# Altium PCB PlacaE3.PcbDoc
Units mm, origin at the board's own origin, x right, y up, seen from the top; angles counter-clockwise.
Board outline 100 x 50 mm, 2 copper layers (Top Layer, Bottom Layer); 27 components, 39 nets, 90 pads, 12 vias.
Unrouted connection lines stored in the file: 16.
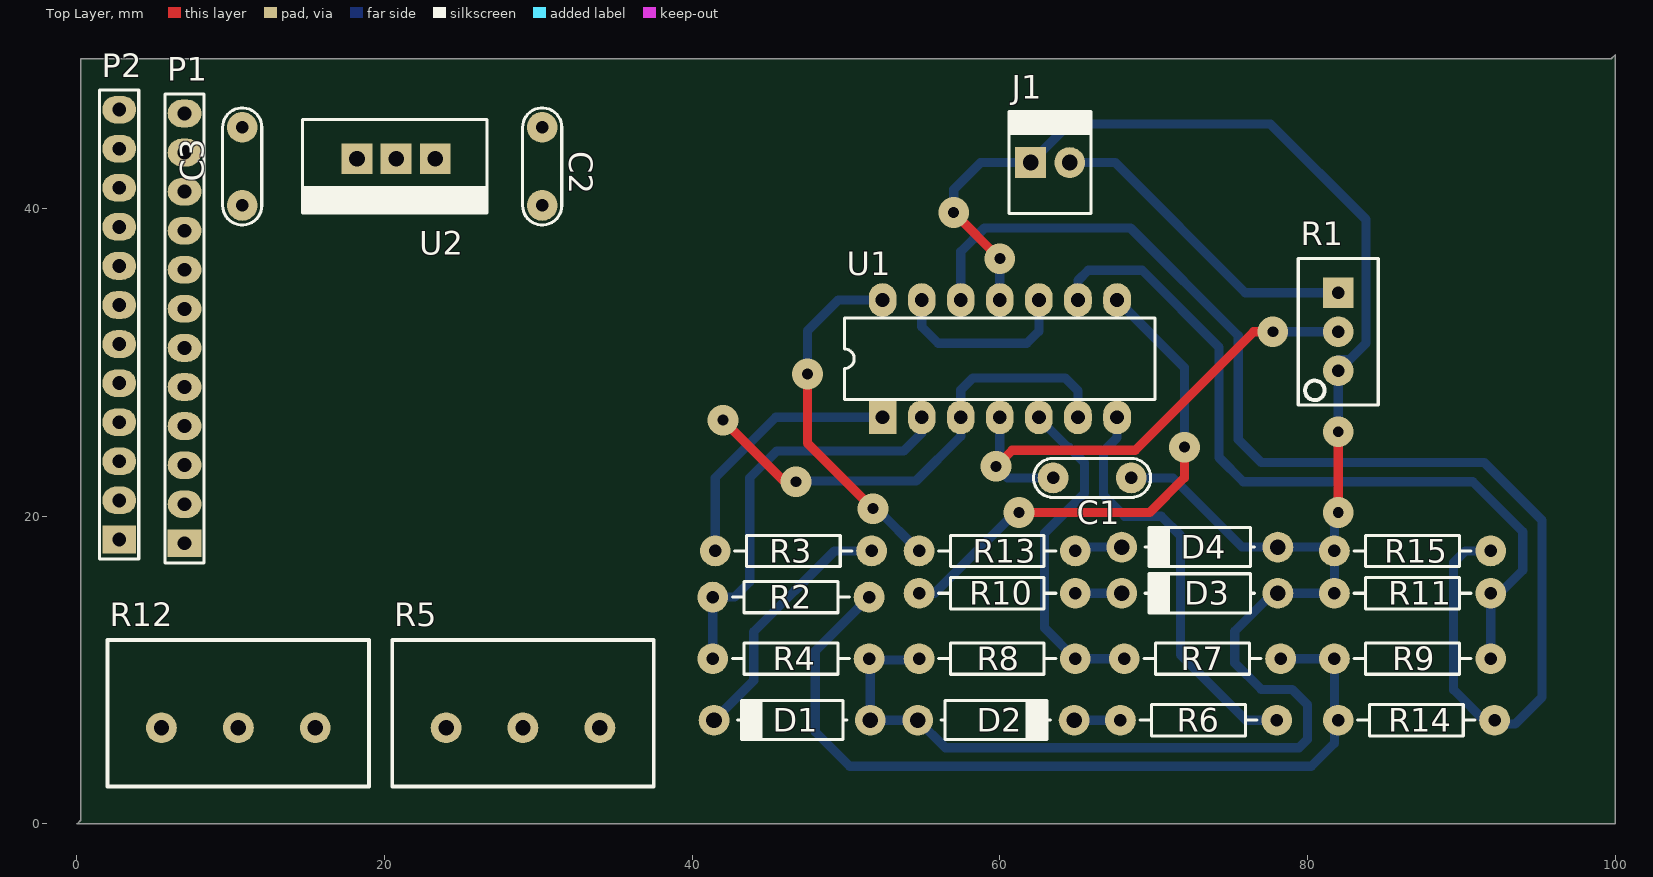
[diagram p0: Top Layer view]
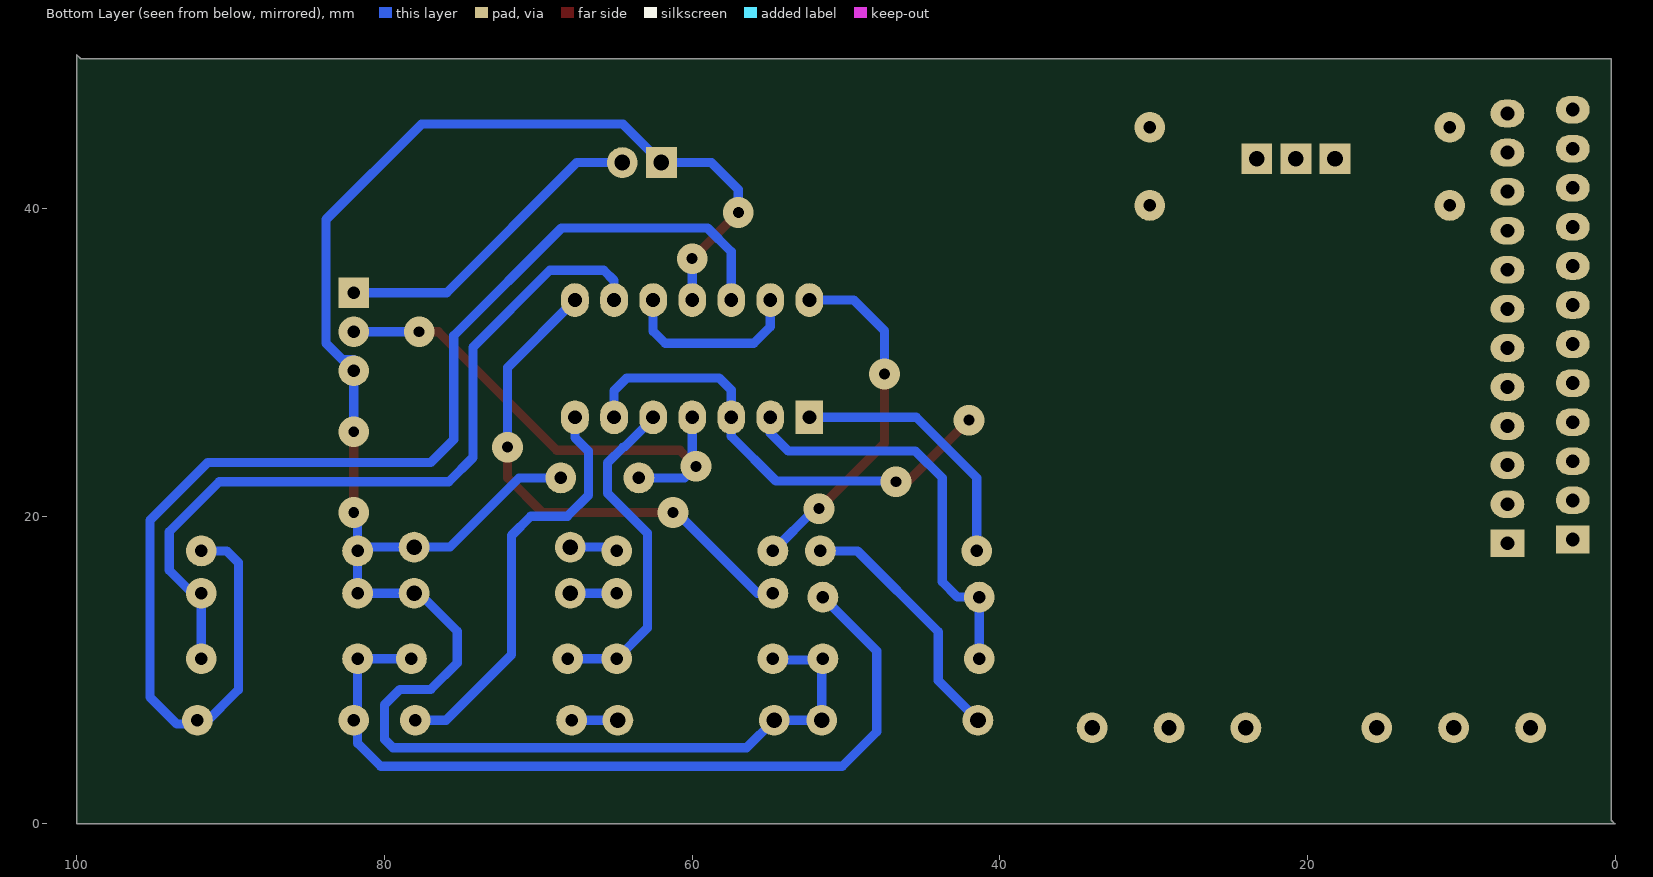
[diagram p1: Bottom Layer view, seen from below]
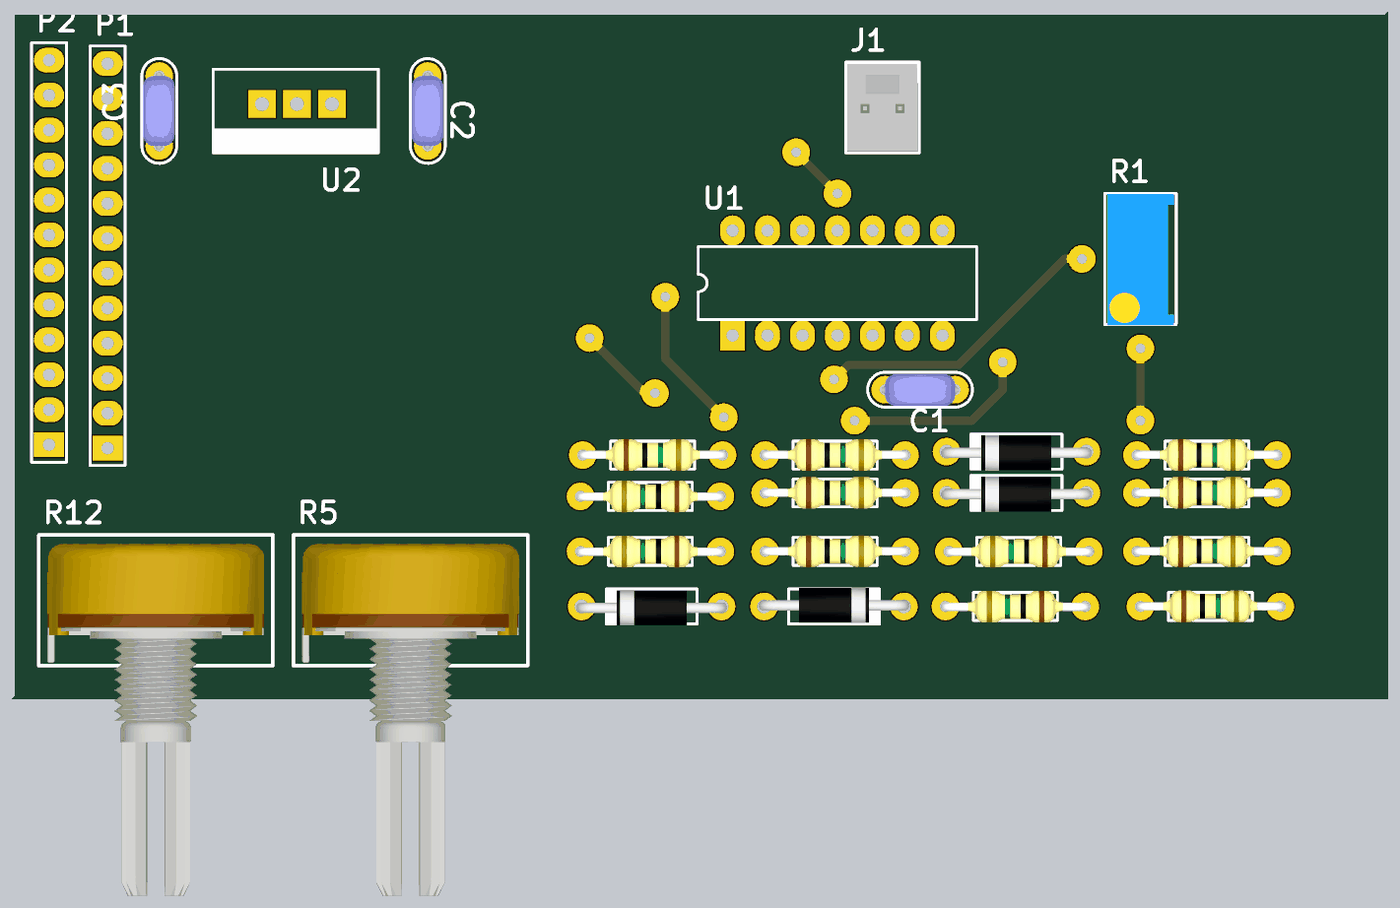
[diagram p2: 3D render of the assembled board from above, using the file's embedded part models]

## Layer stack, top to bottom
Top Solder: solder mask 0.0102, Solder Resist, Dk 3.5
Top Layer: signal copper 0.0356
Dielectric 1: dielectric 0.32, FR-4, Dk 4.8
Bottom Layer: signal copper 0.0356
Bottom Solder: solder mask 0.0102, Solder Resist, Dk 3.5

## Board outline
0,0 0.25,0.25 0.25,49.75 99.75,49.75 100,50 100,0 0,0

## Design rules (kind name [scope] priority, off if disabled: settings)
Clearance [All] p1: gap=0.5
PolygonConnect [All] p1: connectstyle=Relief reliefconductorwidth=0.254 reliefentries=4 polygonreliefangle="90 Angle" airgapwidth=0.254
RoutingVias [All] p1: holewidth=0.711 width=1.27 viastyle="Through Hole" minholewidth=0.711 minwidth=1.27 maxholewidth=0.711 maxwidth=1.27
SolderMaskExpansion [All] p1: expansion=0.102
Width [All] p1: maxlimit=0.6 minlimit=0.6 preferedwidth=0.6 minimp=50.000000 maximp=50.000000 favimp=50.000000
30 further rules are at their usual default settings.

## Components (designator, comment, footprint, x,y, rotation, side; value= is the part's Value field where it differs from the comment)
C1 "CAP" CAP200 66,22.5 r0 top
C2 "CAP" CAP200 30.25,42.75 r270 top
C3 "CAP" CAP200 10.75,42.75 r270 top
D1 "DIODO" DO41 46.5,6.75 r180 top
D2 "DIODO" DO41 59.75,6.75 r0 top
D3 "DIODO" DO41 73,15 r180 top
D4 "DIODO" DO41 73,18 r180 top
J1 "MOLEX2" MOLEX2 62,43 r0 top
P1 "Header 12" HDR1X12 7,18.25 r90 top
P2 "Header 12" HDR1X12 2.75,18.5 r90 top
R1 "PRESET" "PRESET V" 82,32 r270 top
R2 "RES" RES400 51.5,14.75 r180 top
R3 "RES" RES400 41.5,17.75 r0 top
R4 "RES" RES400 51.5,10.75 r180 top
R5 "POTENCIOMETRO" POTENCIOMETRO 29,6.25 r0 top
R6 "RES" RES400 78,6.75 r180 top
R7 "RES" RES400 78.25,10.75 r180 top
R8 "RES" RES400 54.75,10.75 r0 top
R9 "RES" RES400 81.75,10.75 r0 top
R10 "RES" RES400 54.75,15 r0 top
R11 "RES" RES400 81.75,15 r0 top
R12 "POTENCIOMETRO" POTENCIOMETRO 10.5,6.25 r0 top
R13 "RES" RES400 54.75,17.75 r0 top
R14 "RES" RES400 82,6.75 r0 top
R15 "RES" RES400 81.75,17.75 r0 top
U1 "TL084J" J014 60,30.25 r0 top
U2 "78XX" "TO-220 V" 20.75,43.25 r180 top

## Footprints (in the part's own frame and the unit in brackets; to place one, negate y for a bottom-side part, rotate by r counter-clockwise, add the part's x,y. Pads: shape width x height; smd on the part's side, far side on the other; paste and mask are expansions set on the pad)
CAP200 [mm]
  round 2 hole 0.813: 1(-2.54,0) 2(2.54,0)
  silkscreen extent -3.81,-1.27 3.81,1.27, body extent -2.79,-1.17 2.79,1.12, height 6.24
DO41 [mm]
  round 2 hole 1.016: 1(-5.08,0) 2(5.08,0)
  silkscreen extent -3.56,-1.27 3.56,1.27, body extent -5.46,-1.19 5.46,1.37, height 2.03
HDR1X12 [mm] "Connector; Header; 12 Position"
  rect 1.8x2.2 hole 0.9: 1(0,0)
  oval 1.8x2.2 hole 0.9: 2(2.54,0) 3(5.08,0) 4(7.62,0) 5(10.16,0) 6(12.7,0) 7(15.24,0) 8(17.78,0) 9(20.32,0) 10(22.86,0) 11(25.4,0) 12(27.94,0)
  silkscreen extent -1.27,-1.27 29.21,1.27
J014 [mm] "DIP; 14 Leads; Row Spacing 7.62 mm; Pitch 2.54 mm"
  rect 1.8x2.2 hole 0.9: 1(-7.62,-3.81)
  oval 1.8x2.2 hole 0.9: 2(-5.08,-3.81) 3(-2.54,-3.81) 4(0,-3.81) 5(2.54,-3.81) 6(5.08,-3.81) 7(7.62,-3.81) 8(7.62,3.81) 9(5.08,3.81) 10(2.54,3.81) 11(0,3.81) 12(-2.54,3.81) 13(-5.08,3.81) 14(-7.62,3.81)
  silkscreen extent -10.1,-2.65 10.1,2.65
MOLEX2 [mm]
  rect 2x2 hole 1.016: 1(0,0)
  round 2 hole 1.016: 2(2.54,0)
  silkscreen extent -1.4,-3.3 3.94,3.3, body extent -1.27,-3.17 3.81,3.17, height 10.74
POTENCIOMETRO [mm]
  round 2 hole 1: 1(-5,0) 2(0,0) 3(5,0)
  silkscreen extent -8.5,-3.8 8.5,5.7, body extent -7.87,-20.53 7.87,5.03, height 20.12
"PRESET V" [mm]
  rect 2x2 hole 0.813: 1(-2.54,0)
  round 2 hole 0.813: 2(0,0) 3(2.54,0)
  silkscreen extent -4.76,-2.6 4.76,2.6, body extent -4.7,-2.42 4.83,2.42, height 11.55
RES400 [mm]
  round 2 hole 0.813: 1(0,0) 2(10.16,0)
  silkscreen extent 1.27,-1.02 8.89,1.02, body extent -0.3,-1.14 10.46,1.17, height 2.43
"TO-220 V" [mm]
  rect 2x2 hole 1.016: 1(-2.54,0) 2(0,0) 3(2.54,0)
  silkscreen extent -5.9,-2.54 6.1,3.54, body extent -5,-2 5,3, height 18

## Part data
P1 P2: "Header, 12-Pin"
U1: "JFET-Input Operational Amplifier"
U2: "REGULDOR POSITIVO"

## Via types
v1: diameter 2, hole 0.711, Top Layer to Bottom Layer, 12 vias

## Nets (pads, with @x,y where several pads share a name; then routed paths per layer and width w, separated by ;. In a path a pad name is that pad's centre, name@x,y a point inside that pad or via, vN(x,y) a via of type N, cw(c..) or ccw(c..) an arc to the next point about the centre after c; other vN are vias at no path point)
3.3V: C3.1 P1.10 R2.1 R5.1 R7.1 R9.1 R12.1 R14.1 U2.3 | length 54.5
  Bottom Layer w0.6: R2.1 48,11.25 48,6 50.25,3.75 80.25,3.75 81.75,5.25 R9.1 R7.1
GND: C1.2 C2.2 C3.2 D1.1 D2.1 D3.1 D4.1 J1.1 P1.11 P2.12 R1.3 R4.1 R5.3 R8.1 R11.1 R12.3 R15.1 U1.11 U2.2 | length 134.1
  Top Layer w0.6: v1(57,39.75) v1(60,36.75) ; v1(82,20.25) v1(82,25.5)
  Bottom Layer w0.6: R8.1 54.67,10.67 51.58,10.67 D1.1 D2.1 56.47,4.95 79.45,4.95 80,5.5 80,7.75 79,8.75 77,8.75 75.278,10.472 75.278,12.528 77.75,15 D3.1 R11.1 R15.1 ; v1(57,39.75) 57,41.25 58.75,43 J1.1 62,43.006 64.494,45.5 77.6,45.5 83.8,39.3 83.8,31.254 82.746,30.2 82,30.2 R1.3 v1(82,25.5) ; U1.11 v1(60,36.75) ; C1.2 71.25,22.5 75.75,18 D4.1 81.5,18 R15.1 ; v1@81.75,20 R15.1
NetC1_1: C1.1 R1.2 U1.4 | length 33.5
  Top Layer w0.6: v1(59.75,23.25) 60.8,24.3 68.8,24.3 76.5,32 v1(77.75,32)
  Bottom Layer w0.6: U1.4 60,23 60.5,22.5 C1.1 ; v1(77.75,32) R1.2@82.5,32
NetC2_1: C2.1 J1.2 R1.1 U2.1 | length 21
  Bottom Layer w0.6: J1.2 67.5,43 75.96,34.54 R1.1
NetD1_2: D1.2 R3.2 | length 16.7
  Bottom Layer w0.6: D1.2 44,9.33 44,12.5 49.25,17.75 R3.2
NetD2_2: D2.2 R6.2 | length 3.3
  Bottom Layer w0.6: D2.2 R6.2@68.09,6.75
NetD3_2: D3.2 R10.2 | length 3
  Bottom Layer w0.6: R10.2 D3.2
NetD4_2: D4.2 R13.2 | length 3.1
  Bottom Layer w0.6: R13.2 65.16,18 D4.2
NetR2_2: R2.2 R4.2 U1.2 | length 27
  Bottom Layer w0.6: R4.2 R2.2 42.75,14.75 43.75,15.75 43.75,22.5 45.5,24.25 53.75,24.25 54.92,25.42 U1.2
NetR3_1: R3.1 U1.1 | length 17.3
  Bottom Layer w0.6: R3.1 41.5,22.5 45.44,26.44 U1.1
NetR5_2: R5.2 U1.3 U1.6 | length 31.1
  Top Layer w0.6: v1(42,26.25) 46,22.25 v1(46.75,22.25)
  Bottom Layer w0.6: v1@47,22.25 47.05,22.3 54.55,22.3 57.46,25.21 U1.3 57.46,28.21 58.25,29 64.25,29 65.08,28.17 U1.6
NetR6_1: R6.1 U1.7 | length 27.5
  Bottom Layer w0.6: U1.7 67.62,25.12 66.74,24.24 66.74,21.372 68.112,20 70.5,20 71.75,18.75 71.75,11 76,6.75 R6.1@78.25,6.75
NetR7_2: R7.2 R8.2 U1.5 | length 22
  Bottom Layer w0.6: U1.5 62.54,26.376 64.416,24.5 64.48,24.5 65.5,23.48 65.5,21.5 62.91,18.91 62.91,12.75 R8.2 R7.2
NetR9_2: R9.2 R11.2 U1.9 | length 51.4
  Bottom Layer w0.6: U1.9 65.08,35.33 65.75,36 69.25,36 74.25,31 74.25,23.83 75.83,22.25 90.75,22.25 94,19 94,16.5 92.5,15 R11.2 R9.2 R9.2@91.91,10.5
NetR10_1: R10.1 U1.8 | length 33.7
  Top Layer w0.6: v1(61.25,20.25) 69.75,20.25 72,22.5 v1(72,24.5)
  Bottom Layer w0.6: R10.1 55.75,15 61,20.25 v1(61.25,20.25) ; U1.8 72,29.68 v1(72,24.5)
NetR12_2: R12.2 U1.10 U1.13 | length 12.1
  Bottom Layer w0.6: U1.13 54.92,32.33 56,31.25 61.75,31.25 62.54,32.04 U1.10
NetR13_1: R13.1 U1.14 | length 23.2
  Top Layer w0.6: v1(47.5,29.25) 47.5,24.75 v1(51.75,20.5)
  Bottom Layer w0.6: v1(47.5,29.25) 47.5,32.06 49.5,34.06 U1.14 ; v1(51.75,20.5) 52,20.5 R13.1
NetR14_2: R14.2 R15.2 U1.12 | length 83.3
  Bottom Layer w0.6: U1.12 57.46,37.21 59,38.75 68.5,38.75 75.5,31.75 75.5,25 77,23.5 91.5,23.5 95.25,19.75 95.25,8.25 93.5,6.5 91.72,6.5 89.5,8.72 89.5,17 90.25,17.75 R15.2
P1: P2.1
P2: P2.2
P3: P2.3
P4: P2.4
P5: P2.5
P6: P2.6
P7: P2.7
P8: P2.8
P9: P2.9
P10: P2.10
P11: P2.11
P13: P1.1
P14: P1.2
P15: P1.3
P16: P1.4
P17: P1.5
P18: P1.6
P19: P1.7
P20: P1.8
P21: P1.9
RAW: P1.12